# Altium PCB BCM_ECU_revA.PcbDoc (part 4 of 4)
Units mm, origin at the board's own origin, x right, y up, seen from the top; angles counter-clockwise.
Board outline 224 x 100 mm, 4 copper layers (TOP SIG, GND, PWR, BOT SIG), stack 0.603 mm thick; 389 components, 400 nets, 1315 pads, 143 vias.
Unrouted connection lines stored in the file: 689.
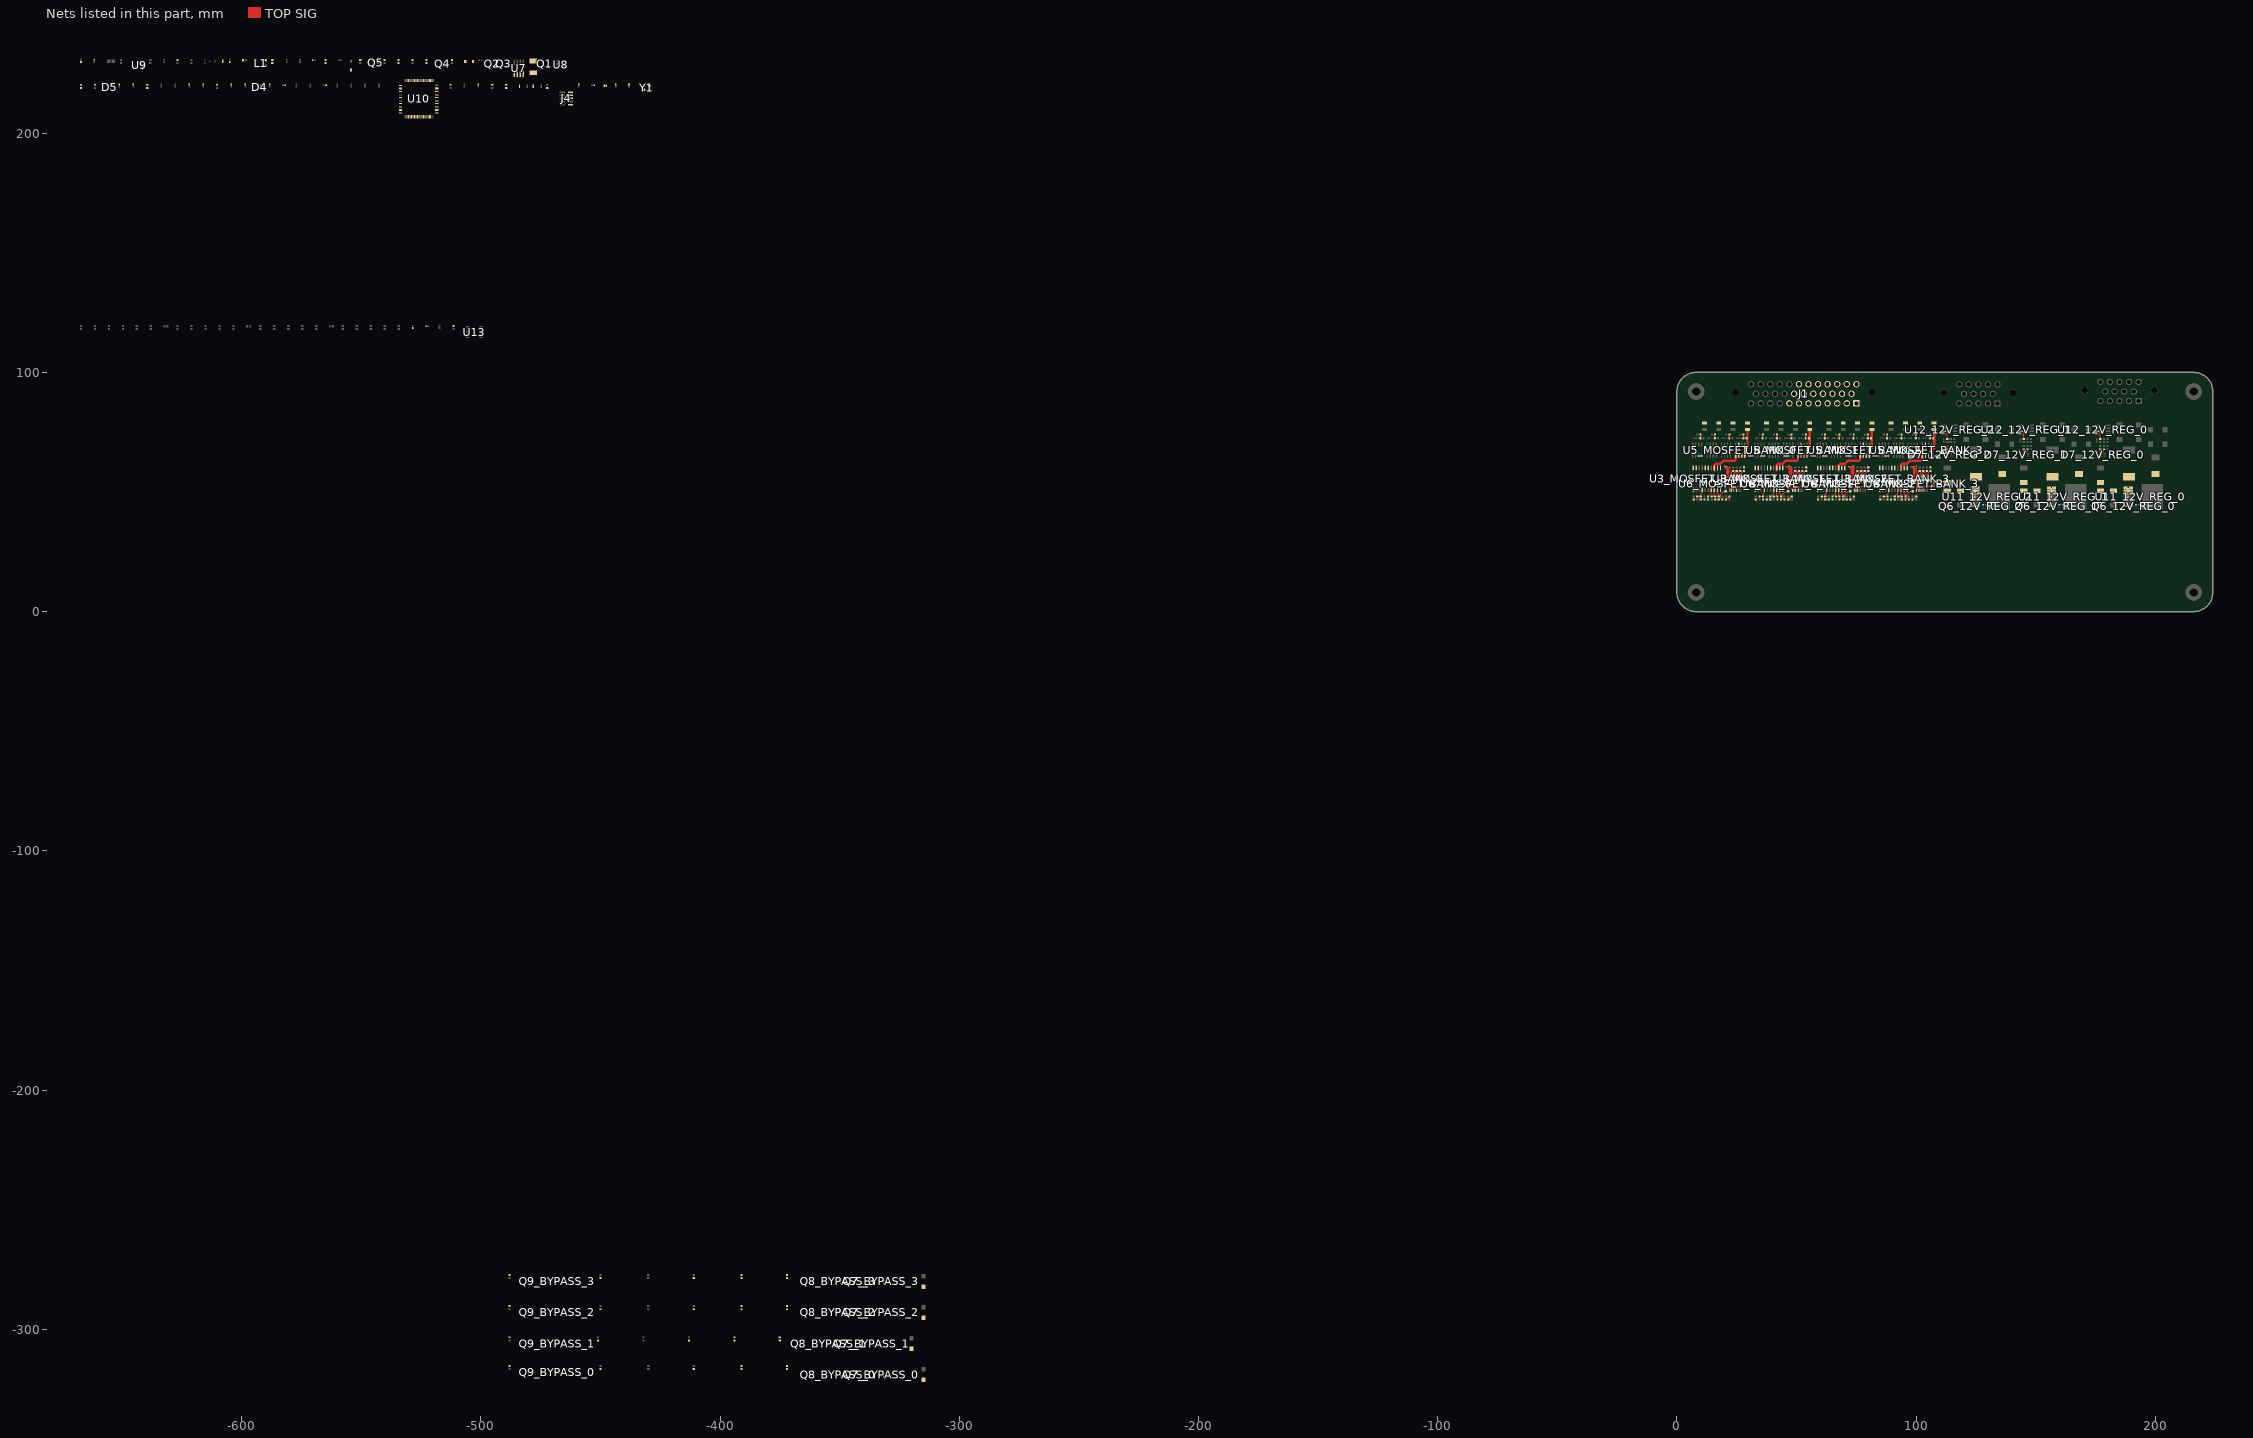
[diagram p3: the nets of this part, all layers, seen from the top]

## Via types
v1: diameter 0.5, hole 0.3, TOP SIG to BOT SIG, 143 vias

## Nets (pads, with @x,y where several pads share a name; then routed paths per layer and width w, separated by ;. In a path a pad name is that pad's centre, name@x,y a point inside that pad or via, vN(x,y) a via of type N, cw(c..) or ccw(c..) an arc to the next point about the centre after c; other vN are vias at no path point) (continued)
M3_TRIG_MOSFET_BANK_0: R2_MOSFET_BANK_0.2 U3_MOSFET_BANK_0.7 | length 3.4
  TOP SIG w0.3: R2_MOSFET_BANK_0.2@13,48.15 13.075,48.15 14.405,49.48 U3_MOSFET_BANK_0.7@14.405,50.95
M3_TRIG_MOSFET_BANK_1: R2_MOSFET_BANK_1.2 U3_MOSFET_BANK_1.7 | length 3.4
  TOP SIG w0.3: R2_MOSFET_BANK_1.2@39,48.15 39.075,48.15 40.405,49.48 U3_MOSFET_BANK_1.7@40.405,50.95
M3_TRIG_MOSFET_BANK_2: R2_MOSFET_BANK_2.2 U3_MOSFET_BANK_2.7 | length 3.4
  TOP SIG w0.3: R2_MOSFET_BANK_2.2@65,48.15 65.075,48.15 66.405,49.48 U3_MOSFET_BANK_2.7@66.405,50.95
M3_TRIG_MOSFET_BANK_3: R2_MOSFET_BANK_3.2 U3_MOSFET_BANK_3.7 | length 3.4
  TOP SIG w0.3: R2_MOSFET_BANK_3.2@91,48.15 91.075,48.15 92.405,49.48 U3_MOSFET_BANK_3.7@92.405,50.95
M4_I_SENSE_MOSFET_BANK_0: R15_MOSFET_BANK_0.2 U5_MOSFET_BANK_0.7 | length 4.6
  TOP SIG w0.3: R15_MOSFET_BANK_0.2@28,60.15 v1(28,61) ; v1@25.865,68.189 U5_MOSFET_BANK_0.7@25.865,69.816 v1@25.865,68.189 ; v1@25.865,68.189 v1@26,68.054 ; v1@25.865,68.189 v1@26,68.054 ; v1@26,68.054 v1(26,68) v1@26,68.054
  other v1: 26,68
M4_I_SENSE_MOSFET_BANK_1: R15_MOSFET_BANK_1.2 U5_MOSFET_BANK_1.7 | length 4.6
  TOP SIG w0.3: R15_MOSFET_BANK_1.2@54,60.15 v1(54,61) ; v1@51.865,68.189 U5_MOSFET_BANK_1.7@51.865,69.816 v1@51.865,68.189 ; v1@51.865,68.189 v1@52,68.054 ; v1@51.865,68.189 v1@52,68.054 ; v1@52,68.054 v1(52,68) v1@52,68.054
  other v1: 52,68
M4_I_SENSE_MOSFET_BANK_2: R15_MOSFET_BANK_2.2 U5_MOSFET_BANK_2.7 | length 4.6
  TOP SIG w0.3: R15_MOSFET_BANK_2.2@80,60.15 v1(80,61) ; v1@77.865,68.189 v1@78,68.054 ; v1@77.865,68.189 U5_MOSFET_BANK_2.7@77.865,69.816 v1@77.865,68.189 ; v1@77.865,68.189 v1@78,68.054 ; v1@78,68.054 v1(78,68) v1@78,68.054
  other v1: 78,68
M4_I_SENSE_MOSFET_BANK_3: R15_MOSFET_BANK_3.2 U5_MOSFET_BANK_3.7 | length 4.6
  TOP SIG w0.3: R15_MOSFET_BANK_3.2@106,60.15 v1(106,61) ; v1@103.865,68.189 v1@104,68.054 ; v1@103.865,68.189 U5_MOSFET_BANK_3.7@103.865,69.816 v1@103.865,68.189 ; v1@103.865,68.189 v1@104,68.054 ; v1@104,68.054 v1(104,68) v1@104,68.054
  other v1: 104,68
M4_OUT_MOSFET_BANK_0: F5_MOSFET_BANK_0.1 R23_MOSFET_BANK_0.2 U5_MOSFET_BANK_0.3 U5_MOSFET_BANK_0.4 | length 11.6
  TOP SIG w1: U5_MOSFET_BANK_0.4@28.405,65.184 28.405,67.405 29,68 29.5,68.5 R23_MOSFET_BANK_0.2@29.5,72.5 ; R23_MOSFET_BANK_0.2@29.15,72.5 29.5,72.85 F5_MOSFET_BANK_0.1@29.5,76.166
M4_OUT_MOSFET_BANK_1: F5_MOSFET_BANK_1.1 R23_MOSFET_BANK_1.2 U5_MOSFET_BANK_1.3 U5_MOSFET_BANK_1.4 | length 11.6
  TOP SIG w1: U5_MOSFET_BANK_1.4@54.405,65.184 54.405,67.405 55,68 55.5,68.5 R23_MOSFET_BANK_1.2@55.5,72.5 ; R23_MOSFET_BANK_1.2@55.15,72.5 55.5,72.85 F5_MOSFET_BANK_1.1@55.5,76.166
M4_OUT_MOSFET_BANK_2: F5_MOSFET_BANK_2.1 R23_MOSFET_BANK_2.2 U5_MOSFET_BANK_2.3 U5_MOSFET_BANK_2.4 | length 11.6
  TOP SIG w1: U5_MOSFET_BANK_2.4@80.405,65.184 80.405,67.405 81,68 81.5,68.5 R23_MOSFET_BANK_2.2@81.5,72.5 ; R23_MOSFET_BANK_2.2@81.15,72.5 81.5,72.85 F5_MOSFET_BANK_2.1@81.5,76.166
M4_OUT_MOSFET_BANK_3: F5_MOSFET_BANK_3.1 R23_MOSFET_BANK_3.2 U5_MOSFET_BANK_3.3 U5_MOSFET_BANK_3.4 | length 11.6
  TOP SIG w1: U5_MOSFET_BANK_3.4@106.405,65.184 106.405,67.405 107,68 107.5,68.5 R23_MOSFET_BANK_3.2@107.5,72.5 ; R23_MOSFET_BANK_3.2@107.15,72.5 107.5,72.85 F5_MOSFET_BANK_3.1@107.5,76.166
M4_PRE_SHUNT_MOSFET_BANK_0: U3_MOSFET_BANK_0.13 U5_MOSFET_BANK_0.1 U5_MOSFET_BANK_0.2 | length 14.6
  TOP SIG w1: 15.675,59.075 15.675,61.214 16.261,61.8 18.173,61.8 19.373,63 24.009,63 24.595,63.586 U5_MOSFET_BANK_0.1@24.595,65.184 24.595,66.121
M4_PRE_SHUNT_MOSFET_BANK_1: U3_MOSFET_BANK_1.13 U5_MOSFET_BANK_1.1 U5_MOSFET_BANK_1.2 | length 14.6
  TOP SIG w1: 41.675,59.075 41.675,61.214 42.261,61.8 44.173,61.8 45.373,63 50.009,63 50.595,63.586 U5_MOSFET_BANK_1.1@50.595,65.184 50.595,66.121
M4_PRE_SHUNT_MOSFET_BANK_2: U3_MOSFET_BANK_2.13 U5_MOSFET_BANK_2.1 U5_MOSFET_BANK_2.2 | length 14.6
  TOP SIG w1: 67.675,59.075 67.675,61.214 68.261,61.8 70.173,61.8 71.373,63 76.009,63 76.595,63.586 U5_MOSFET_BANK_2.1@76.595,65.184 76.595,66.121
M4_PRE_SHUNT_MOSFET_BANK_3: U3_MOSFET_BANK_3.13 U5_MOSFET_BANK_3.1 U5_MOSFET_BANK_3.2 | length 14.6
  TOP SIG w1: 93.675,59.075 93.675,61.214 94.261,61.8 96.173,61.8 97.373,63 102.009,63 102.595,63.586 U5_MOSFET_BANK_3.1@102.595,65.184 102.595,66.121
M4_TRIG_MOSFET_BANK_0: R4_MOSFET_BANK_0.2 U3_MOSFET_BANK_0.9 | length 3
  TOP SIG w0.3: U3_MOSFET_BANK_0.9@16.945,50.95 16.945,49.555 17.5,49 R4_MOSFET_BANK_0.2@17.5,48.15
M4_TRIG_MOSFET_BANK_1: R4_MOSFET_BANK_1.2 U3_MOSFET_BANK_1.9 | length 3
  TOP SIG w0.3: U3_MOSFET_BANK_1.9@42.945,50.95 42.945,49.555 43.5,49 R4_MOSFET_BANK_1.2@43.5,48.15
M4_TRIG_MOSFET_BANK_2: R4_MOSFET_BANK_2.2 U3_MOSFET_BANK_2.9 | length 3
  TOP SIG w0.3: U3_MOSFET_BANK_2.9@68.945,50.95 68.945,49.555 69.5,49 R4_MOSFET_BANK_2.2@69.5,48.15
M4_TRIG_MOSFET_BANK_3: R4_MOSFET_BANK_3.2 U3_MOSFET_BANK_3.9 | length 3
  TOP SIG w0.3: U3_MOSFET_BANK_3.9@94.945,50.95 94.945,49.555 95.5,49 R4_MOSFET_BANK_3.2@95.5,48.15
NetC6_MOSFET_BANK_0_1: C6_MOSFET_BANK_0.1 C7_MOSFET_BANK_0.1 R18_MOSFET_BANK_0.2 U6_MOSFET_BANK_0.13 | length 8.6
  TOP SIG w0.3: U6_MOSFET_BANK_0.13@24.825,50.7 24.825,51.825 25.5,52.5 C7_MOSFET_BANK_0.1@28.521,52.5 ; C6_MOSFET_BANK_0.1@28.521,51 C7_MOSFET_BANK_0.1@28.521,52.5 ; R18_MOSFET_BANK_0.2@29.65,54 29.65,53.925 28.729,53.004 28.729,52.686 28.543,52.5 C7_MOSFET_BANK_0.1@28.521,52.5
NetC6_MOSFET_BANK_1_1: C6_MOSFET_BANK_1.1 C7_MOSFET_BANK_1.1 R18_MOSFET_BANK_1.2 U6_MOSFET_BANK_1.13 | length 8.6
  TOP SIG w0.3: U6_MOSFET_BANK_1.13@50.825,50.7 50.825,51.825 51.5,52.5 C7_MOSFET_BANK_1.1@54.521,52.5 ; C6_MOSFET_BANK_1.1@54.521,51 C7_MOSFET_BANK_1.1@54.521,52.5 ; R18_MOSFET_BANK_1.2@55.65,54 55.65,53.925 54.729,53.004 54.729,52.686 54.543,52.5 C7_MOSFET_BANK_1.1@54.521,52.5
NetC6_MOSFET_BANK_2_1: C6_MOSFET_BANK_2.1 C7_MOSFET_BANK_2.1 R18_MOSFET_BANK_2.2 U6_MOSFET_BANK_2.13 | length 8.6
  TOP SIG w0.3: U6_MOSFET_BANK_2.13@76.825,50.7 76.825,51.825 77.5,52.5 C7_MOSFET_BANK_2.1@80.521,52.5 ; C6_MOSFET_BANK_2.1@80.521,51 C7_MOSFET_BANK_2.1@80.521,52.5 ; R18_MOSFET_BANK_2.2@81.65,54 81.65,53.925 80.729,53.004 80.729,52.686 80.543,52.5 C7_MOSFET_BANK_2.1@80.521,52.5
NetC6_MOSFET_BANK_3_1: C6_MOSFET_BANK_3.1 C7_MOSFET_BANK_3.1 R18_MOSFET_BANK_3.2 U6_MOSFET_BANK_3.13 | length 8.6
  TOP SIG w0.3: U6_MOSFET_BANK_3.13@102.825,50.7 102.825,51.825 103.5,52.5 C7_MOSFET_BANK_3.1@106.521,52.5 ; C6_MOSFET_BANK_3.1@106.521,51 C7_MOSFET_BANK_3.1@106.521,52.5 ; R18_MOSFET_BANK_3.2@107.65,54 107.65,53.925 106.729,53.004 106.729,52.686 106.543,52.5 C7_MOSFET_BANK_3.1@106.521,52.5
NetC11_1: C11.1 D2.1 R34.2 U8.10
NetC13_1: C13.1 R34.1 R35.2 SW1.2
NetC32_2: C32.2 C33.2 U10.48
NetC34_2: C34.2 C35.2 U10.73
NetC47_12V_REG_0_1: C47_12V_REG_0.1 D6_12V_REG_0.1 L2_12V_REG_0.1 U11_12V_REG_0.1
  other v1: 188.65,51.81
NetC47_12V_REG_0_2: C47_12V_REG_0.2 U11_12V_REG_0.3
  other v1: 188.65,49.27
NetC47_12V_REG_1_1: C47_12V_REG_1.1 D6_12V_REG_1.1 L2_12V_REG_1.1 U11_12V_REG_1.1
  other v1: 156.65,51.81
NetC47_12V_REG_1_2: C47_12V_REG_1.2 U11_12V_REG_1.3
  other v1: 156.65,49.27
NetC47_12V_REG_2_1: C47_12V_REG_2.1 D6_12V_REG_2.1 L2_12V_REG_2.1 U11_12V_REG_2.1
  other v1: 124.65,51.81
NetC47_12V_REG_2_2: C47_12V_REG_2.2 U11_12V_REG_2.3
  other v1: 124.65,49.27
NetC50_1: C50.1 C51.1 R62.2 U13.13
NetD4_1: D4.1 R46.2
NetD4_4: D4.4 R47.2
NetD5_1: D5.1 R48.2
NetD5_4: D5.4 R49.2
NetD7_12V_REG_0_1: D7_12V_REG_0.1 R54_12V_REG_0.2 | length 3.4
  TOP SIG w0.3: R54_12V_REG_0.2@177,67.85 177,67 176.5,66.5 176.5,65.6 177.05,65.05 D7_12V_REG_0.1@177.2,65.05
NetD7_12V_REG_0_4: D7_12V_REG_0.4 R55_12V_REG_0.2 | length 2.5
  TOP SIG w0.3: D7_12V_REG_0.4@177.2,65.95 177.35,65.95 178.4,67 178.4,67.75 R55_12V_REG_0.2@178.5,67.85
NetD7_12V_REG_1_1: D7_12V_REG_1.1 R54_12V_REG_1.2 | length 3.4
  TOP SIG w0.3: R54_12V_REG_1.2@145,67.85 145,67 144.5,66.5 144.5,65.6 145.05,65.05 D7_12V_REG_1.1@145.2,65.05
NetD7_12V_REG_1_4: D7_12V_REG_1.4 R55_12V_REG_1.2 | length 2.5
  TOP SIG w0.3: D7_12V_REG_1.4@145.2,65.95 145.35,65.95 146.4,67 146.4,67.75 R55_12V_REG_1.2@146.5,67.85
NetD7_12V_REG_2_1: D7_12V_REG_2.1 R54_12V_REG_2.2 | length 3.4
  TOP SIG w0.3: R54_12V_REG_2.2@113,67.85 113,67 112.5,66.5 112.5,65.6 113.05,65.05 D7_12V_REG_2.1@113.2,65.05
NetD7_12V_REG_2_4: D7_12V_REG_2.4 R55_12V_REG_2.2 | length 2.5
  TOP SIG w0.3: D7_12V_REG_2.4@113.2,65.95 113.35,65.95 114.4,67 114.4,67.75 R55_12V_REG_2.2@114.5,67.85
NetD8_BYPASS_0_1: D8_BYPASS_0.1 Q8_BYPASS_0.5-6-7-8 Q9_BYPASS_0.4 R56_BYPASS_0.1
NetD8_BYPASS_1_1: D8_BYPASS_1.1 Q8_BYPASS_1.5-6-7-8 Q9_BYPASS_1.4 R56_BYPASS_1.1
NetD8_BYPASS_2_1: D8_BYPASS_2.1 Q8_BYPASS_2.5-6-7-8 Q9_BYPASS_2.4 R56_BYPASS_2.1
NetD8_BYPASS_3_1: D8_BYPASS_3.1 Q8_BYPASS_3.5-6-7-8 Q9_BYPASS_3.4 R56_BYPASS_3.1
NetF1_2: F1.2 Q1.5-6-7-8 Q2.5-6-7-8
NetQ5_1: Q5.1 R32.2 R33.2
NetQ6_12V_REG_0_1: Q6_12V_REG_0.1 R52_12V_REG_0.1 R53_12V_REG_0.1
NetQ6_12V_REG_1_1: Q6_12V_REG_1.1 R52_12V_REG_1.1 R53_12V_REG_1.1
NetQ6_12V_REG_2_1: Q6_12V_REG_2.1 R52_12V_REG_2.1 R53_12V_REG_2.1
NetQ7_BYPASS_0_1: Q7_BYPASS_0.1 Q7_BYPASS_0.2 Q7_BYPASS_0.3 Q8_BYPASS_0.1 Q8_BYPASS_0.2 Q8_BYPASS_0.3
NetQ7_BYPASS_1_1: Q7_BYPASS_1.1 Q7_BYPASS_1.2 Q7_BYPASS_1.3 Q8_BYPASS_1.1 Q8_BYPASS_1.2 Q8_BYPASS_1.3
NetQ7_BYPASS_2_1: Q7_BYPASS_2.1 Q7_BYPASS_2.2 Q7_BYPASS_2.3 Q8_BYPASS_2.1 Q8_BYPASS_2.2 Q8_BYPASS_2.3
NetQ7_BYPASS_3_1: Q7_BYPASS_3.1 Q7_BYPASS_3.2 Q7_BYPASS_3.3 Q8_BYPASS_3.1 Q8_BYPASS_3.2 Q8_BYPASS_3.3
NetQ9_BYPASS_0_2: Q9_BYPASS_0.2 R60_BYPASS_0.1 R61_BYPASS_0.2
NetQ9_BYPASS_0_3: Q9_BYPASS_0.3 R58_BYPASS_0.1
NetQ9_BYPASS_0_5: Q9_BYPASS_0.5 R56_BYPASS_0.2 R57_BYPASS_0.1
NetQ9_BYPASS_1_2: Q9_BYPASS_1.2 R60_BYPASS_1.1 R61_BYPASS_1.2
NetQ9_BYPASS_1_3: Q9_BYPASS_1.3 R58_BYPASS_1.1
NetQ9_BYPASS_1_5: Q9_BYPASS_1.5 R56_BYPASS_1.2 R57_BYPASS_1.1
NetQ9_BYPASS_2_2: Q9_BYPASS_2.2 R60_BYPASS_2.1 R61_BYPASS_2.2
NetQ9_BYPASS_2_3: Q9_BYPASS_2.3 R58_BYPASS_2.1
NetQ9_BYPASS_2_5: Q9_BYPASS_2.5 R56_BYPASS_2.2 R57_BYPASS_2.1
NetQ9_BYPASS_3_2: Q9_BYPASS_3.2 R60_BYPASS_3.1 R61_BYPASS_3.2
NetQ9_BYPASS_3_3: Q9_BYPASS_3.3 R58_BYPASS_3.1
NetQ9_BYPASS_3_5: Q9_BYPASS_3.5 R56_BYPASS_3.2 R57_BYPASS_3.1
NetR1_MOSFET_BANK_0_1: R1_MOSFET_BANK_0.1
NetR1_MOSFET_BANK_1_1: R1_MOSFET_BANK_1.1
NetR1_MOSFET_BANK_2_1: R1_MOSFET_BANK_2.1
NetR1_MOSFET_BANK_3_1: R1_MOSFET_BANK_3.1
NetR2_MOSFET_BANK_0_1: R2_MOSFET_BANK_0.1
NetR2_MOSFET_BANK_1_1: R2_MOSFET_BANK_1.1
NetR2_MOSFET_BANK_2_1: R2_MOSFET_BANK_2.1
NetR2_MOSFET_BANK_3_1: R2_MOSFET_BANK_3.1
NetR3_MOSFET_BANK_0_1: R3_MOSFET_BANK_0.1
NetR3_MOSFET_BANK_1_1: R3_MOSFET_BANK_1.1
NetR3_MOSFET_BANK_2_1: R3_MOSFET_BANK_2.1
NetR3_MOSFET_BANK_3_1: R3_MOSFET_BANK_3.1
NetR4_MOSFET_BANK_0_1: R4_MOSFET_BANK_0.1
NetR4_MOSFET_BANK_1_1: R4_MOSFET_BANK_1.1
NetR4_MOSFET_BANK_2_1: R4_MOSFET_BANK_2.1
NetR4_MOSFET_BANK_3_1: R4_MOSFET_BANK_3.1
NetR6_MOSFET_BANK_0_1: R6_MOSFET_BANK_0.1
NetR6_MOSFET_BANK_1_1: R6_MOSFET_BANK_1.1
NetR6_MOSFET_BANK_2_1: R6_MOSFET_BANK_2.1
NetR6_MOSFET_BANK_3_1: R6_MOSFET_BANK_3.1
NetR8_MOSFET_BANK_0_1: R8_MOSFET_BANK_0.1
NetR8_MOSFET_BANK_1_1: R8_MOSFET_BANK_1.1
NetR8_MOSFET_BANK_2_1: R8_MOSFET_BANK_2.1
NetR8_MOSFET_BANK_3_1: R8_MOSFET_BANK_3.1
NetR9_MOSFET_BANK_0_1: R9_MOSFET_BANK_0.1 R10_MOSFET_BANK_0.1 | length 2
  TOP SIG w0.3: R10_MOSFET_BANK_0.1@20.5,46.85 20.575,46.85 21.625,47.9 21.75,47.9 R9_MOSFET_BANK_0.1@22,48.15
NetR9_MOSFET_BANK_1_1: R9_MOSFET_BANK_1.1 R10_MOSFET_BANK_1.1 | length 2
  TOP SIG w0.3: R10_MOSFET_BANK_1.1@46.5,46.85 46.575,46.85 47.625,47.9 47.75,47.9 R9_MOSFET_BANK_1.1@48,48.15
NetR9_MOSFET_BANK_2_1: R9_MOSFET_BANK_2.1 R10_MOSFET_BANK_2.1 | length 2
  TOP SIG w0.3: R10_MOSFET_BANK_2.1@72.5,46.85 72.575,46.85 73.625,47.9 73.75,47.9 R9_MOSFET_BANK_2.1@74,48.15
NetR9_MOSFET_BANK_3_1: R9_MOSFET_BANK_3.1 R10_MOSFET_BANK_3.1 | length 2
  TOP SIG w0.3: R10_MOSFET_BANK_3.1@98.5,46.85 98.575,46.85 99.625,47.9 99.75,47.9 R9_MOSFET_BANK_3.1@100,48.15
NetR15_MOSFET_BANK_0_1: R15_MOSFET_BANK_0.1 U6_MOSFET_BANK_0.4 | length 4.8
  TOP SIG w0.3: U6_MOSFET_BANK_0.4@24.825,56.3 24.825,57.324 25.001,57.5 26.575,57.5 27.925,58.85 R15_MOSFET_BANK_0.1@28,58.85
NetR15_MOSFET_BANK_1_1: R15_MOSFET_BANK_1.1 U6_MOSFET_BANK_1.4 | length 4.8
  TOP SIG w0.3: U6_MOSFET_BANK_1.4@50.825,56.3 50.825,57.324 51.001,57.5 52.575,57.5 53.925,58.85 R15_MOSFET_BANK_1.1@54,58.85
NetR15_MOSFET_BANK_2_1: R15_MOSFET_BANK_2.1 U6_MOSFET_BANK_2.4 | length 4.8
  TOP SIG w0.3: U6_MOSFET_BANK_2.4@76.825,56.3 76.825,57.324 77.001,57.5 78.575,57.5 79.925,58.85 R15_MOSFET_BANK_2.1@80,58.85
NetR15_MOSFET_BANK_3_1: R15_MOSFET_BANK_3.1 U6_MOSFET_BANK_3.4 | length 4.8
  TOP SIG w0.3: U6_MOSFET_BANK_3.4@102.825,56.3 102.825,57.324 103.001,57.5 104.575,57.5 105.925,58.85 R15_MOSFET_BANK_3.1@106,58.85
NetR16_MOSFET_BANK_0_1: R16_MOSFET_BANK_0.1 U6_MOSFET_BANK_0.5 | length 4
  TOP SIG w0.3: U6_MOSFET_BANK_0.5@24.175,56.3 24.175,57.375 24.8,58 25.575,58 26.425,58.85 R16_MOSFET_BANK_0.1@26.5,58.85
NetR16_MOSFET_BANK_1_1: R16_MOSFET_BANK_1.1 U6_MOSFET_BANK_1.5 | length 4
  TOP SIG w0.3: U6_MOSFET_BANK_1.5@50.175,56.3 50.175,57.375 50.8,58 51.575,58 52.425,58.85 R16_MOSFET_BANK_1.1@52.5,58.85
NetR16_MOSFET_BANK_2_1: R16_MOSFET_BANK_2.1 U6_MOSFET_BANK_2.5 | length 4
  TOP SIG w0.3: U6_MOSFET_BANK_2.5@76.175,56.3 76.175,57.375 76.8,58 77.575,58 78.425,58.85 R16_MOSFET_BANK_2.1@78.5,58.85
NetR16_MOSFET_BANK_3_1: R16_MOSFET_BANK_3.1 U6_MOSFET_BANK_3.5 | length 4
  TOP SIG w0.3: U6_MOSFET_BANK_3.5@102.175,56.3 102.175,57.375 102.8,58 103.575,58 104.425,58.85 R16_MOSFET_BANK_3.1@104.5,58.85
NetR17_MOSFET_BANK_0_1: R17_MOSFET_BANK_0.1 U6_MOSFET_BANK_0.6 | length 3.2
  TOP SIG w0.3: U6_MOSFET_BANK_0.6@23.525,56.3 23.525,57.45 24.925,58.85 R17_MOSFET_BANK_0.1@25,58.85
NetR17_MOSFET_BANK_1_1: R17_MOSFET_BANK_1.1 U6_MOSFET_BANK_1.6 | length 3.2
  TOP SIG w0.3: U6_MOSFET_BANK_1.6@49.525,56.3 49.525,57.45 50.925,58.85 R17_MOSFET_BANK_1.1@51,58.85
NetR17_MOSFET_BANK_2_1: R17_MOSFET_BANK_2.1 U6_MOSFET_BANK_2.6 | length 3.2
  TOP SIG w0.3: U6_MOSFET_BANK_2.6@75.525,56.3 75.525,57.45 76.925,58.85 R17_MOSFET_BANK_2.1@77,58.85
NetR17_MOSFET_BANK_3_1: R17_MOSFET_BANK_3.1 U6_MOSFET_BANK_3.6 | length 3.2
  TOP SIG w0.3: U6_MOSFET_BANK_3.6@101.525,56.3 101.525,57.45 102.925,58.85 R17_MOSFET_BANK_3.1@103,58.85
NetR19_MOSFET_BANK_0_1: R19_MOSFET_BANK_0.1 U6_MOSFET_BANK_0.7 | length 2.9
  TOP SIG w0.3: U6_MOSFET_BANK_0.7@22.875,56.3 22.875,58.3 23.425,58.85 R19_MOSFET_BANK_0.1@23.5,58.85
NetR19_MOSFET_BANK_1_1: R19_MOSFET_BANK_1.1 U6_MOSFET_BANK_1.7 | length 2.9
  TOP SIG w0.3: U6_MOSFET_BANK_1.7@48.875,56.3 48.875,58.3 49.425,58.85 R19_MOSFET_BANK_1.1@49.5,58.85
NetR19_MOSFET_BANK_2_1: R19_MOSFET_BANK_2.1 U6_MOSFET_BANK_2.7 | length 2.9
  TOP SIG w0.3: U6_MOSFET_BANK_2.7@74.875,56.3 74.875,58.3 75.425,58.85 R19_MOSFET_BANK_2.1@75.5,58.85
NetR19_MOSFET_BANK_3_1: R19_MOSFET_BANK_3.1 U6_MOSFET_BANK_3.7 | length 2.9
  TOP SIG w0.3: U6_MOSFET_BANK_3.7@100.875,56.3 100.875,58.3 101.425,58.85 R19_MOSFET_BANK_3.1@101.5,58.85
NetR35_1: R35.1 U8.9
NetR42_2: R42.2 SW2.1
NetR43_2: R43.2 SW3.1
NetR50_12V_REG_0_1: R50_12V_REG_0.1 U11_12V_REG_0.5
  other v1: 188.65,46.73
NetR50_12V_REG_1_1: R50_12V_REG_1.1 U11_12V_REG_1.5
  other v1: 156.65,46.73
NetR50_12V_REG_2_1: R50_12V_REG_2.1 U11_12V_REG_2.5
  other v1: 124.65,46.73
NetR87_12V_REG_0_2: R87_12V_REG_0.2 U12_12V_REG_0.7 | length 4.2
  TOP SIG w0.3: U12_12V_REG_0.7@175.684,75.365 176.35,75.365 177,74.715 R87_12V_REG_0.2@177,72.15
NetR87_12V_REG_1_2: R87_12V_REG_1.2 U12_12V_REG_1.7 | length 4.2
  TOP SIG w0.3: U12_12V_REG_1.7@143.684,75.365 144.35,75.365 145,74.715 R87_12V_REG_1.2@145,72.15
NetR87_12V_REG_2_2: R87_12V_REG_2.2 U12_12V_REG_2.7 | length 4.2
  TOP SIG w0.3: U12_12V_REG_2.7@111.684,75.365 112.35,75.365 113,74.715 R87_12V_REG_2.2@113,72.15
NetU10_1: U10.1
NetU10_2: U10.2
NetU10_3: U10.3
NetU10_4: U10.4
NetU10_5: U10.5
NetU10_7: U10.7
NetU10_17: U10.17
NetU10_18: U10.18
NetU10_22: U10.22
NetU10_23: U10.23
NetU10_24: U10.24
NetU10_25: U10.25
NetU10_28: U10.28
NetU10_29: U10.29
NetU10_30: U10.30
NetU10_31: U10.31
NetU10_32: U10.32
NetU10_33: U10.33
NetU10_34: U10.34
NetU10_35: U10.35
NetU10_36: U10.36
NetU10_37: U10.37
NetU10_38: U10.38
NetU10_39: U10.39
NetU10_40: U10.40
NetU10_41: U10.41
NetU10_42: U10.42
NetU10_43: U10.43
NetU10_44: U10.44
NetU10_45: U10.45
NetU10_46: U10.46
NetU10_47: U10.47
NetU10_51: U10.51
NetU10_52: U10.52
NetU10_53: U10.53
NetU10_54: U10.54
NetU10_55: U10.55
NetU10_56: U10.56
NetU10_57: U10.57
NetU10_58: U10.58
NetU10_59: U10.59
NetU10_60: U10.60
NetU10_61: U10.61
NetU10_62: U10.62
NetU10_63: U10.63
NetU10_64: U10.64
NetU10_65: U10.65
NetU10_66: U10.66
NetU10_67: U10.67
NetU10_68: U10.68
NetU10_69: U10.69
NetU10_70: U10.70
NetU10_71: U10.71
NetU10_77: U10.77
NetU10_78: U10.78
NetU10_79: U10.79
NetU10_80: U10.80
NetU10_81: U10.81
NetU10_82: U10.82
NetU10_83: U10.83
NetU10_84: U10.84
NetU10_85: U10.85
NetU10_86: U10.86
NetU10_87: U10.87
NetU10_88: U10.88
NetU10_90: U10.90
NetU10_91: U10.91
NetU10_92: U10.92
NetU10_93: U10.93
NetU10_95: U10.95
NetU10_96: U10.96
NetU10_97: U10.97
NetU10_98: U10.98
nINH_BYPASS_0: Q9_BYPASS_0.6 R57_BYPASS_0.2
nINH_BYPASS_1: Q9_BYPASS_1.6 R57_BYPASS_1.2
nINH_BYPASS_2: Q9_BYPASS_2.6 R57_BYPASS_2.2
nINH_BYPASS_3: Q9_BYPASS_3.6 R57_BYPASS_3.2
nPWR_FLT_LED: R49.1
OUT_0: F2_MOSFET_BANK_0.2 J1.1 Q7_BYPASS_0.5-6-7-8
OUT_1: F3_MOSFET_BANK_0.2 J1.2 Q7_BYPASS_1.5-6-7-8
OUT_2: F4_MOSFET_BANK_0.2 J1.3 Q7_BYPASS_2.5-6-7-8
OUT_3: F5_MOSFET_BANK_0.2 J1.4 Q7_BYPASS_3.5-6-7-8
OUT_4: F2_MOSFET_BANK_1.2 J1.5
OUT_5: F3_MOSFET_BANK_1.2 J1.6
OUT_6: F4_MOSFET_BANK_1.2 J1.13
OUT_7: F5_MOSFET_BANK_1.2 J1.14
OUT_8: F2_MOSFET_BANK_2.2 J1.15
OUT_9: F3_MOSFET_BANK_2.2 J1.16
OUT_10: F4_MOSFET_BANK_2.2 J1.17
OUT_11: F5_MOSFET_BANK_2.2 J1.24
OUT_12: F2_MOSFET_BANK_3.2 J1.25
OUT_13: F3_MOSFET_BANK_3.2 J1.26
OUT_14: F4_MOSFET_BANK_3.2 J1.27
OUT_15: F5_MOSFET_BANK_3.2 J1.28
PD_1_MOSFET_BANK_0: R20_MOSFET_BANK_0.1 R24_MOSFET_BANK_0.1 U6_MOSFET_BANK_0.8 | length 6.3
  TOP SIG w0.3: R20_MOSFET_BANK_0.1@9.85,72.5 9.875,72.525 9.875,73.975 R24_MOSFET_BANK_0.1@9.9,74 ; v1(22,61) 22,60.3 22.225,60.075 U6_MOSFET_BANK_0.8@22.225,56.3
  other v1: 9.25,72.5
PD_1_MOSFET_BANK_1: R20_MOSFET_BANK_1.1 R24_MOSFET_BANK_1.1 U6_MOSFET_BANK_1.8 | length 6.3
  TOP SIG w0.3: R20_MOSFET_BANK_1.1@35.85,72.5 35.875,72.525 35.875,73.975 R24_MOSFET_BANK_1.1@35.9,74 ; v1(48,61) 48,60.3 48.225,60.075 U6_MOSFET_BANK_1.8@48.225,56.3
  other v1: 35.25,72.5
PD_1_MOSFET_BANK_2: R20_MOSFET_BANK_2.1 R24_MOSFET_BANK_2.1 U6_MOSFET_BANK_2.8 | length 6.3
  TOP SIG w0.3: R20_MOSFET_BANK_2.1@61.85,72.5 61.875,72.525 61.875,73.975 R24_MOSFET_BANK_2.1@61.9,74 ; v1(74,61) 74,60.3 74.225,60.075 U6_MOSFET_BANK_2.8@74.225,56.3
  other v1: 61.25,72.5
PD_1_MOSFET_BANK_3: R20_MOSFET_BANK_3.1 R24_MOSFET_BANK_3.1 U6_MOSFET_BANK_3.8 | length 6.3
  TOP SIG w0.3: R20_MOSFET_BANK_3.1@87.85,72.5 87.875,72.525 87.875,73.975 R24_MOSFET_BANK_3.1@87.9,74 ; v1(100,61) 100,60.3 100.225,60.075 U6_MOSFET_BANK_3.8@100.225,56.3
  other v1: 87.25,72.5
PD_2_MOSFET_BANK_0: R21_MOSFET_BANK_0.1 R25_MOSFET_BANK_0.1 U6_MOSFET_BANK_0.9 | length 12.8
  TOP SIG w0.3: R21_MOSFET_BANK_0.1@15.85,72.5 15.875,72.525 15.875,73.975 R25_MOSFET_BANK_0.1@15.9,74 ; v1(19.75,61) 19.77,60.98 19.77,60.63 20.9,59.5 20.9,55.214 22.225,53.889 U6_MOSFET_BANK_0.9@22.225,50.7
  other v1: 15.25,72.5
PD_2_MOSFET_BANK_1: R21_MOSFET_BANK_1.1 R25_MOSFET_BANK_1.1 U6_MOSFET_BANK_1.9 | length 12.8
  TOP SIG w0.3: R21_MOSFET_BANK_1.1@41.85,72.5 41.875,72.525 41.875,73.975 R25_MOSFET_BANK_1.1@41.9,74 ; v1(45.75,61) 45.77,60.98 45.77,60.63 46.9,59.5 46.9,55.214 48.225,53.889 U6_MOSFET_BANK_1.9@48.225,50.7
  other v1: 41.25,72.5
PD_2_MOSFET_BANK_2: R21_MOSFET_BANK_2.1 R25_MOSFET_BANK_2.1 U6_MOSFET_BANK_2.9 | length 12.8
  TOP SIG w0.3: R21_MOSFET_BANK_2.1@67.85,72.5 67.875,72.525 67.875,73.975 R25_MOSFET_BANK_2.1@67.9,74 ; v1(71.75,61) 71.77,60.98 71.77,60.63 72.9,59.5 72.9,55.214 74.225,53.889 U6_MOSFET_BANK_2.9@74.225,50.7
  other v1: 67.25,72.5
PD_2_MOSFET_BANK_3: R21_MOSFET_BANK_3.1 R25_MOSFET_BANK_3.1 U6_MOSFET_BANK_3.9 | length 12.8
  TOP SIG w0.3: R21_MOSFET_BANK_3.1@93.85,72.5 93.875,72.525 93.875,73.975 R25_MOSFET_BANK_3.1@93.9,74 ; v1(97.75,61) 97.77,60.98 97.77,60.63 98.9,59.5 98.9,55.214 100.225,53.889 U6_MOSFET_BANK_3.9@100.225,50.7
  other v1: 93.25,72.5
PD_3_MOSFET_BANK_0: R22_MOSFET_BANK_0.1 R26_MOSFET_BANK_0.1 U6_MOSFET_BANK_0.10 | length 12.8
  TOP SIG w0.3: v1(20.5,61) 20.5,60.532 21.302,59.73 21.302,55.38 22.875,53.807 U6_MOSFET_BANK_0.10@22.875,50.7 ; R22_MOSFET_BANK_0.1@21.85,72.5 21.875,72.525 21.875,73.975 R26_MOSFET_BANK_0.1@21.9,74
  other v1: 21.25,72.5
PD_3_MOSFET_BANK_1: R22_MOSFET_BANK_1.1 R26_MOSFET_BANK_1.1 U6_MOSFET_BANK_1.10 | length 12.8
  TOP SIG w0.3: v1(46.5,61) 46.5,60.532 47.302,59.73 47.302,55.38 48.875,53.807 U6_MOSFET_BANK_1.10@48.875,50.7 ; R22_MOSFET_BANK_1.1@47.85,72.5 47.875,72.525 47.875,73.975 R26_MOSFET_BANK_1.1@47.9,74
  other v1: 47.25,72.5
PD_3_MOSFET_BANK_2: R22_MOSFET_BANK_2.1 R26_MOSFET_BANK_2.1 U6_MOSFET_BANK_2.10 | length 12.8
  TOP SIG w0.3: v1(72.5,61) 72.5,60.532 73.302,59.73 73.302,55.38 74.875,53.807 U6_MOSFET_BANK_2.10@74.875,50.7 ; R22_MOSFET_BANK_2.1@73.85,72.5 73.875,72.525 73.875,73.975 R26_MOSFET_BANK_2.1@73.9,74
  other v1: 73.25,72.5
PD_3_MOSFET_BANK_3: R22_MOSFET_BANK_3.1 R26_MOSFET_BANK_3.1 U6_MOSFET_BANK_3.10 | length 12.8
  TOP SIG w0.3: v1(98.5,61) 98.5,60.532 99.302,59.73 99.302,55.38 100.875,53.807 U6_MOSFET_BANK_3.10@100.875,50.7 ; R22_MOSFET_BANK_3.1@99.85,72.5 99.875,72.525 99.875,73.975 R26_MOSFET_BANK_3.1@99.9,74
  other v1: 99.25,72.5
PD_4_MOSFET_BANK_0: R23_MOSFET_BANK_0.1 R27_MOSFET_BANK_0.1 U6_MOSFET_BANK_0.11 | length 12.8
  TOP SIG w0.3: v1(21.25,61) 21.25,60.35 21.703,59.897 21.703,55.547 23.525,53.725 U6_MOSFET_BANK_0.11@23.525,50.7 ; R23_MOSFET_BANK_0.1@27.85,72.5 27.875,72.525 27.875,73.975 R27_MOSFET_BANK_0.1@27.9,74
  other v1: 27.25,72.5
PD_4_MOSFET_BANK_1: R23_MOSFET_BANK_1.1 R27_MOSFET_BANK_1.1 U6_MOSFET_BANK_1.11 | length 12.8
  TOP SIG w0.3: v1(47.25,61) 47.25,60.35 47.703,59.897 47.703,55.547 49.525,53.725 U6_MOSFET_BANK_1.11@49.525,50.7 ; R23_MOSFET_BANK_1.1@53.85,72.5 53.875,72.525 53.875,73.975 R27_MOSFET_BANK_1.1@53.9,74
  other v1: 53.25,72.5
PD_4_MOSFET_BANK_2: R23_MOSFET_BANK_2.1 R27_MOSFET_BANK_2.1 U6_MOSFET_BANK_2.11 | length 12.8
  TOP SIG w0.3: v1(73.25,61) 73.25,60.35 73.703,59.897 73.703,55.547 75.525,53.725 U6_MOSFET_BANK_2.11@75.525,50.7 ; R23_MOSFET_BANK_2.1@79.85,72.5 79.875,72.525 79.875,73.975 R27_MOSFET_BANK_2.1@79.9,74
  other v1: 79.25,72.5
PD_4_MOSFET_BANK_3: R23_MOSFET_BANK_3.1 R27_MOSFET_BANK_3.1 U6_MOSFET_BANK_3.11 | length 12.8
  TOP SIG w0.3: v1(99.25,61) 99.25,60.35 99.703,59.897 99.703,55.547 101.525,53.725 U6_MOSFET_BANK_3.11@101.525,50.7 ; R23_MOSFET_BANK_3.1@105.85,72.5 105.875,72.525 105.875,73.975 R27_MOSFET_BANK_3.1@105.9,74
  other v1: 105.25,72.5
PRE_CAN_N: L1.3 U8.12
PRE_CAN_P: L1.2 U8.13
PRE_SHUNT: Q3.5-6-7-8 Q4.5-6-7-8 U7.1 U7.2
PRE_VCC: D1.1 Q1.1 Q1.2 Q1.3 Q2.1 Q2.2 Q2.3 Q3.1 Q3.2 Q3.3 Q4.1 Q4.2 Q4.3 R31.2
PWR_IN: F1.1 J1.7 J1.8 J1.18 J1.19 J1.29 J1.30
PWR_IN_12V_REG_0: C16.1 C40_12V_REG_0.2 C40_12V_REG_1.2 C40_12V_REG_2.2 C41_12V_REG_0.2 C41_12V_REG_1.2 C41_12V_REG_2.2 C42_12V_REG_0.2 C42_12V_REG_1.2 C42_12V_REG_2.2 R29.2 U3_MOSFET_BANK_0.1 U3_MOSFET_BANK_0.10 U3_MOSFET_BANK_0.11 U3_MOSFET_BANK_0.12 U3_MOSFET_BANK_0.15 U3_MOSFET_BANK_0.16 U3_MOSFET_BANK_0.19 U3_MOSFET_BANK_0.20 U3_MOSFET_BANK_1.1 U3_MOSFET_BANK_1.10 U3_MOSFET_BANK_1.11 U3_MOSFET_BANK_1.12 U3_MOSFET_BANK_1.15 U3_MOSFET_BANK_1.16 U3_MOSFET_BANK_1.19 U3_MOSFET_BANK_1.20 U3_MOSFET_BANK_2.1 U3_MOSFET_BANK_2.10 U3_MOSFET_BANK_2.11 U3_MOSFET_BANK_2.12 U3_MOSFET_BANK_2.15 U3_MOSFET_BANK_2.16 U3_MOSFET_BANK_2.19 U3_MOSFET_BANK_2.20 U3_MOSFET_BANK_3.1 U3_MOSFET_BANK_3.10 U3_MOSFET_BANK_3.11 U3_MOSFET_BANK_3.12 U3_MOSFET_BANK_3.15 U3_MOSFET_BANK_3.16 U3_MOSFET_BANK_3.19 U3_MOSFET_BANK_3.20 U7.3 U7.4 U9.3 U11_12V_REG_0.2 U11_12V_REG_1.2 U11_12V_REG_2.2
PWR_MOSFET: Q3.4 Q4.4 Q5.3 R31.1
R_LED: R47.1 U10.16
REG_nINH_12V_REG_0: Q6_12V_REG_0.3 U11_12V_REG_0.7
  other v1: 188.65,44.19
REG_nINH_12V_REG_1: Q6_12V_REG_1.3 U11_12V_REG_1.7
  other v1: 156.65,44.19
REG_nINH_12V_REG_2: Q6_12V_REG_2.3 U11_12V_REG_2.7
  other v1: 124.65,44.19
RESETN: C23.2 J4.10 R43.1 R45.2 U10.14
RP_MOS_LINK: D1.2 Q1.4 Q2.4 R28.2
STAT_12_MOSFET_BANK_0: R6_MOSFET_BANK_0.2 R11_MOSFET_BANK_0.1 U3_MOSFET_BANK_0.8 | length 4.3
  TOP SIG w0.3: R11_MOSFET_BANK_0.1@14.5,48.15 15.925,48.15 15.675,48.4 U3_MOSFET_BANK_0.8@15.675,50.95
STAT_12_MOSFET_BANK_1: R6_MOSFET_BANK_1.2 R11_MOSFET_BANK_1.1 U3_MOSFET_BANK_1.8 | length 4.3
  TOP SIG w0.3: R11_MOSFET_BANK_1.1@40.5,48.15 41.925,48.15 41.675,48.4 U3_MOSFET_BANK_1.8@41.675,50.95
STAT_12_MOSFET_BANK_2: R6_MOSFET_BANK_2.2 R11_MOSFET_BANK_2.1 U3_MOSFET_BANK_2.8 | length 4.3
  TOP SIG w0.3: R11_MOSFET_BANK_2.1@66.5,48.15 67.925,48.15 67.675,48.4 U3_MOSFET_BANK_2.8@67.675,50.95
STAT_12_MOSFET_BANK_3: R6_MOSFET_BANK_3.2 R11_MOSFET_BANK_3.1 U3_MOSFET_BANK_3.8 | length 4.3
  TOP SIG w0.3: R11_MOSFET_BANK_3.1@92.5,48.15 93.925,48.15 93.675,48.4 U3_MOSFET_BANK_3.8@93.675,50.95
STAT_34_MOSFET_BANK_0: R8_MOSFET_BANK_0.2 R12_MOSFET_BANK_0.1 U3_MOSFET_BANK_0.4 | length 4.5
  TOP SIG w0.3: R12_MOSFET_BANK_0.1@8.5,48.15 R8_MOSFET_BANK_0.2@10,48.15 10,49 10.595,49.595 U3_MOSFET_BANK_0.4@10.595,50.95
STAT_34_MOSFET_BANK_1: R8_MOSFET_BANK_1.2 R12_MOSFET_BANK_1.1 U3_MOSFET_BANK_1.4 | length 4.5
  TOP SIG w0.3: R12_MOSFET_BANK_1.1@34.5,48.15 R8_MOSFET_BANK_1.2@36,48.15 36,49 36.595,49.595 U3_MOSFET_BANK_1.4@36.595,50.95
STAT_34_MOSFET_BANK_2: R8_MOSFET_BANK_2.2 R12_MOSFET_BANK_2.1 U3_MOSFET_BANK_2.4 | length 4.5
  TOP SIG w0.3: R12_MOSFET_BANK_2.1@60.5,48.15 R8_MOSFET_BANK_2.2@62,48.15 62,49 62.595,49.595 U3_MOSFET_BANK_2.4@62.595,50.95
STAT_34_MOSFET_BANK_3: R8_MOSFET_BANK_3.2 R12_MOSFET_BANK_3.1 U3_MOSFET_BANK_3.4 | length 4.5
  TOP SIG w0.3: R12_MOSFET_BANK_3.1@86.5,48.15 R8_MOSFET_BANK_3.2@88,48.15 88,49 88.595,49.595 U3_MOSFET_BANK_3.4@88.595,50.95
SWCLK: J4.4 R41.1 U10.76
SWDIO: J4.2 U10.72
SWO: J4.6 U10.89
TEMP_SENSE_MOSFET_BANK_0: R13_MOSFET_BANK_0.1 R14_MOSFET_BANK_0.1 | length 5.2
  TOP SIG w0.3: R14_MOSFET_BANK_0.1@19,46.85 18.925,46.85 18.273,47.502 18.273,48.973 19.6,50.3 R13_MOSFET_BANK_0.1@20.5,50.3
TEMP_SENSE_MOSFET_BANK_1: R13_MOSFET_BANK_1.1 R14_MOSFET_BANK_1.1 | length 5.2
  TOP SIG w0.3: R14_MOSFET_BANK_1.1@45,46.85 44.925,46.85 44.273,47.502 44.273,48.973 45.6,50.3 R13_MOSFET_BANK_1.1@46.5,50.3
TEMP_SENSE_MOSFET_BANK_2: R13_MOSFET_BANK_2.1 R14_MOSFET_BANK_2.1 | length 5.2
  TOP SIG w0.3: R14_MOSFET_BANK_2.1@71,46.85 70.925,46.85 70.273,47.502 70.273,48.973 71.6,50.3 R13_MOSFET_BANK_2.1@72.5,50.3
TEMP_SENSE_MOSFET_BANK_3: R13_MOSFET_BANK_3.1 R14_MOSFET_BANK_3.1 | length 5.2
  TOP SIG w0.3: R14_MOSFET_BANK_3.1@97,46.85 96.925,46.85 96.273,47.502 96.273,48.973 97.6,50.3 R13_MOSFET_BANK_3.1@98.5,50.3
TERM_CAP: C17.2 R36.1 R38.2
VCC_SENSE: R29.1 R30.2
VDDA: C30.2 C31.2 C38.2 C39.2 FB1.2 U10.20 U10.21
X32_N: C21.2 U10.9 Y2.2
X32_P: C20.2 U10.8 Y2.1
X_N: C18.2 U10.13 Y1.1
X_P: C19.2 U10.12 Y1.3
pads on no net: J1. J2. J2.3 J2.12 J3. J3.3 J3.12 J4.7 J4.8 J4.9

## Polygon pours and split planes (outlines as drawn)
12V_FB_12V_REG_1 on TOP SIG "12V_FB_12V_REG_1_L01_P046" (solid, pour order 46): 167.5,68 164,68 164,65.5 149,65.5 149,71 146,71 146,76 163,76 163,78 167.5,78
NetC47_12V_REG_1_1 on TOP SIG "NETC47_12V_REG_1_1_L01_P048" (solid, pour order 48): 164,68 172,68 172,58.5 164,58.5 164,54 161.5,54 161.5,51.25 154.5,51.25 154.5,65.5 164,65.5
PWR_IN_12V_REG_0 on TOP SIG "PWR_IN_12V_REG_0_L01_P050" (solid, pour order 50): 143,55.5 154.5,55.5 154.5,51.25 161.5,51.25 161.5,49.75 154.5,49.75 154.5,49 143,49
PWR_IN_12V_REG_0 on TOP SIG "PWR_IN_12V_REG_0_L01_P050" (solid, pour order 50): 111,55.5 122.5,55.5 122.5,51.25 129.5,51.25 129.5,49.75 122.5,49.75 122.5,49 111,49
12V_FB_12V_REG_2 on TOP SIG "12V_FB_12V_REG_2_L01_P046" (solid, pour order 46): 135.5,68 132,68 132,65.5 117,65.5 117,71 114,71 114,76 131,76 131,78 135.5,78
NetC47_12V_REG_2_1 on TOP SIG "NETC47_12V_REG_2_1_L01_P048" (solid, pour order 48): 132,68 140,68 140,58.5 132,58.5 132,54 129.5,54 129.5,51.25 122.5,51.25 122.5,65.5 132,65.5
NetC47_12V_REG_0_1 on TOP SIG "NETC47_12V_REG_0_1_L01_P047" (solid, pour order 47): 196,68 204,68 204,58.5 196,58.5 196,54 193.5,54 193.5,51.25 186.5,51.25 186.5,65.5 196,65.5
M2_OUT_MOSFET_BANK_3 on TOP SIG "M2_OUT_MOSFET_BANK_3_L01_P020" (solid, pour order 20): 92.5,67 92.5,64 95.5,64 95.5,67
M4_OUT_MOSFET_BANK_3 on TOP SIG "M4_OUT_MOSFET_BANK_3_L01_P044" (solid, pour order 44): 104.5,67 104.5,64 107.5,64 107.5,67
M4_PRE_SHUNT_MOSFET_BANK_3 on TOP SIG "M4_PRE_SHUNT_MOSFET_BANK_3_L01_P040" (solid, pour order 40): 101.5,67 104.5,67 104.5,64 101.5,64
M3_OUT_MOSFET_BANK_3 on TOP SIG "M3_OUT_MOSFET_BANK_3_L01_P036" (solid, pour order 36): 98.5,67 98.5,64 101.5,64 101.5,67
M3_PRE_SHUNT_MOSFET_BANK_3 on TOP SIG "M3_PRE_SHUNT_MOSFET_BANK_3_L01_P032" (solid, pour order 32): 95.5,67 98.5,67 98.5,64 95.5,64
M1_OUT_MOSFET_BANK_3 on TOP SIG "M1_OUT_MOSFET_BANK_3_L01_P028" (solid, pour order 28): 86.5,67 86.5,64 89.5,64 89.5,67
M1_PRE_SHUNT_MOSFET_BANK_3 on TOP SIG "M1_PRE_SHUNT_MOSFET_BANK_3_L01_P024" (solid, pour order 24): 83.5,67 86.5,67 86.5,64 83.5,64
M2_PRE_SHUNT_MOSFET_BANK_3 on TOP SIG "M2_PRE_SHUNT_MOSFET_BANK_3_L01_P016" (solid, pour order 16): 89.5,67 92.5,67 92.5,64 89.5,64
M2_OUT_MOSFET_BANK_2 on TOP SIG "M2_OUT_MOSFET_BANK_2_L01_P019" (solid, pour order 19): 66.5,67 66.5,64 69.5,64 69.5,67
M4_OUT_MOSFET_BANK_2 on TOP SIG "M4_OUT_MOSFET_BANK_2_L01_P043" (solid, pour order 43): 78.5,67 78.5,64 81.5,64 81.5,67
M4_PRE_SHUNT_MOSFET_BANK_2 on TOP SIG "M4_PRE_SHUNT_MOSFET_BANK_2_L01_P039" (solid, pour order 39): 75.5,67 78.5,67 78.5,64 75.5,64
M3_OUT_MOSFET_BANK_2 on TOP SIG "M3_OUT_MOSFET_BANK_2_L01_P035" (solid, pour order 35): 72.5,67 72.5,64 75.5,64 75.5,67
M3_PRE_SHUNT_MOSFET_BANK_2 on TOP SIG "M3_PRE_SHUNT_MOSFET_BANK_2_L01_P031" (solid, pour order 31): 69.5,67 72.5,67 72.5,64 69.5,64
M1_OUT_MOSFET_BANK_2 on TOP SIG "M1_OUT_MOSFET_BANK_2_L01_P027" (solid, pour order 27): 60.5,67 60.5,64 63.5,64 63.5,67
M1_PRE_SHUNT_MOSFET_BANK_2 on TOP SIG "M1_PRE_SHUNT_MOSFET_BANK_2_L01_P023" (solid, pour order 23): 57.5,67 60.5,67 60.5,64 57.5,64
M2_PRE_SHUNT_MOSFET_BANK_2 on TOP SIG "M2_PRE_SHUNT_MOSFET_BANK_2_L01_P015" (solid, pour order 15): 63.5,67 66.5,67 66.5,64 63.5,64
M2_OUT_MOSFET_BANK_1 on TOP SIG "M2_OUT_MOSFET_BANK_1_L01_P018" (solid, pour order 18): 40.5,67 40.5,64 43.5,64 43.5,67
M4_OUT_MOSFET_BANK_1 on TOP SIG "M4_OUT_MOSFET_BANK_1_L01_P042" (solid, pour order 42): 52.5,67 52.5,64 55.5,64 55.5,67
M4_PRE_SHUNT_MOSFET_BANK_1 on TOP SIG "M4_PRE_SHUNT_MOSFET_BANK_1_L01_P038" (solid, pour order 38): 49.5,67 52.5,67 52.5,64 49.5,64
M3_OUT_MOSFET_BANK_1 on TOP SIG "M3_OUT_MOSFET_BANK_1_L01_P034" (solid, pour order 34): 46.5,67 46.5,64 49.5,64 49.5,67
M3_PRE_SHUNT_MOSFET_BANK_1 on TOP SIG "M3_PRE_SHUNT_MOSFET_BANK_1_L01_P030" (solid, pour order 30): 43.5,67 46.5,67 46.5,64 43.5,64
M1_OUT_MOSFET_BANK_1 on TOP SIG "M1_OUT_MOSFET_BANK_1_L01_P026" (solid, pour order 26): 34.5,67 34.5,64 37.5,64 37.5,67
M1_PRE_SHUNT_MOSFET_BANK_1 on TOP SIG "M1_PRE_SHUNT_MOSFET_BANK_1_L01_P022" (solid, pour order 22): 31.5,67 34.5,67 34.5,64 31.5,64
M2_PRE_SHUNT_MOSFET_BANK_1 on TOP SIG "M2_PRE_SHUNT_MOSFET_BANK_1_L01_P014" (solid, pour order 14): 37.5,67 40.5,67 40.5,64 37.5,64
12V_FB_12V_REG_0 on TOP SIG "12V_FB_12V_REG_0_L01_P045" (solid, pour order 45): 199.5,68 196,68 196,65.5 181,65.5 181,71 178,71 178,76 195,76 195,78 199.5,78
PWR_IN_12V_REG_0 on TOP SIG "PWR_IN_12V_REG_0_L01_P049" (solid, pour order 49): 175,55.5 186.5,55.5 186.5,51.25 193.5,51.25 193.5,49.75 186.5,49.75 186.5,49 175,49
M2_PRE_SHUNT_MOSFET_BANK_0 on TOP SIG "M2_PRE_SHUNT_MOSFET_BANK_0_L01_P013" (solid, pour order 13): 11.5,67 14.5,67 14.5,64 11.5,64
M1_PRE_SHUNT_MOSFET_BANK_0 on TOP SIG "M1_PRE_SHUNT_MOSFET_BANK_0_L01_P021" (solid, pour order 21): 5.5,67 8.5,67 8.5,64 5.5,64
M1_OUT_MOSFET_BANK_0 on TOP SIG "M1_OUT_MOSFET_BANK_0_L01_P025" (solid, pour order 25): 8.5,67 8.5,64 11.5,64 11.5,67
M3_PRE_SHUNT_MOSFET_BANK_0 on TOP SIG "M3_PRE_SHUNT_MOSFET_BANK_0_L01_P029" (solid, pour order 29): 17.5,67 20.5,67 20.5,64 17.5,64
M3_OUT_MOSFET_BANK_0 on TOP SIG "M3_OUT_MOSFET_BANK_0_L01_P033" (solid, pour order 33): 20.5,67 20.5,64 23.5,64 23.5,67
M4_PRE_SHUNT_MOSFET_BANK_0 on TOP SIG "M4_PRE_SHUNT_MOSFET_BANK_0_L01_P037" (solid, pour order 37): 23.5,67 26.5,67 26.5,64 23.5,64
M4_OUT_MOSFET_BANK_0 on TOP SIG "M4_OUT_MOSFET_BANK_0_L01_P041" (solid, pour order 41): 26.5,67 26.5,64 29.5,64 29.5,67
M2_OUT_MOSFET_BANK_0 on TOP SIG "M2_OUT_MOSFET_BANK_0_L01_P017" (solid, pour order 17): 14.5,67 14.5,64 17.5,64 17.5,67

## Silkscreen, mask and mechanical layers (free items; w line width, h text height)
Top Overlay:
  text "STAT" at 116.793,63.619 h1.52 r180
  text "STAT" at 148.793,63.619 h1.52 r180
  text "BCM ECU" at 6,27 h5
  text "Project:" at 5.5,23.666 h2
  text "BRZ" at 24.35,23.333 h2
  text "Revision:" at 5.5,20 h2
  text "A" at 24.35,20 h2
  text "Date:" at 5.5,16.5 h2
  text "15/03/2025" at 24.35,16.5 h2
Mechanical 1:
  the board outline again, w0.15

## Text inside footprints (layer, text, board x,y; h text height)
J2: Top 3D Body "PCB EDGE" at 189.256,101.263 h1.27 r180
J3: Top 3D Body "PCB EDGE" at 130.256,100.263 h1.27 r180
U8: Top 3D Body "*" at -467.602,229.429 h1.27; Top Overlay "*" at -468.726,230.307 h1.27